# Altium PCB helix_4_multi_shield_host.PcbDoc (part 2 of 3)
Units mm, origin at the board's own origin, x right, y up, seen from the top; angles counter-clockwise.
Board outline 150 x 170 mm, 2 copper layers (Top Layer, Bottom Layer); 120 components, 166 nets, 674 pads, 2020 vias.
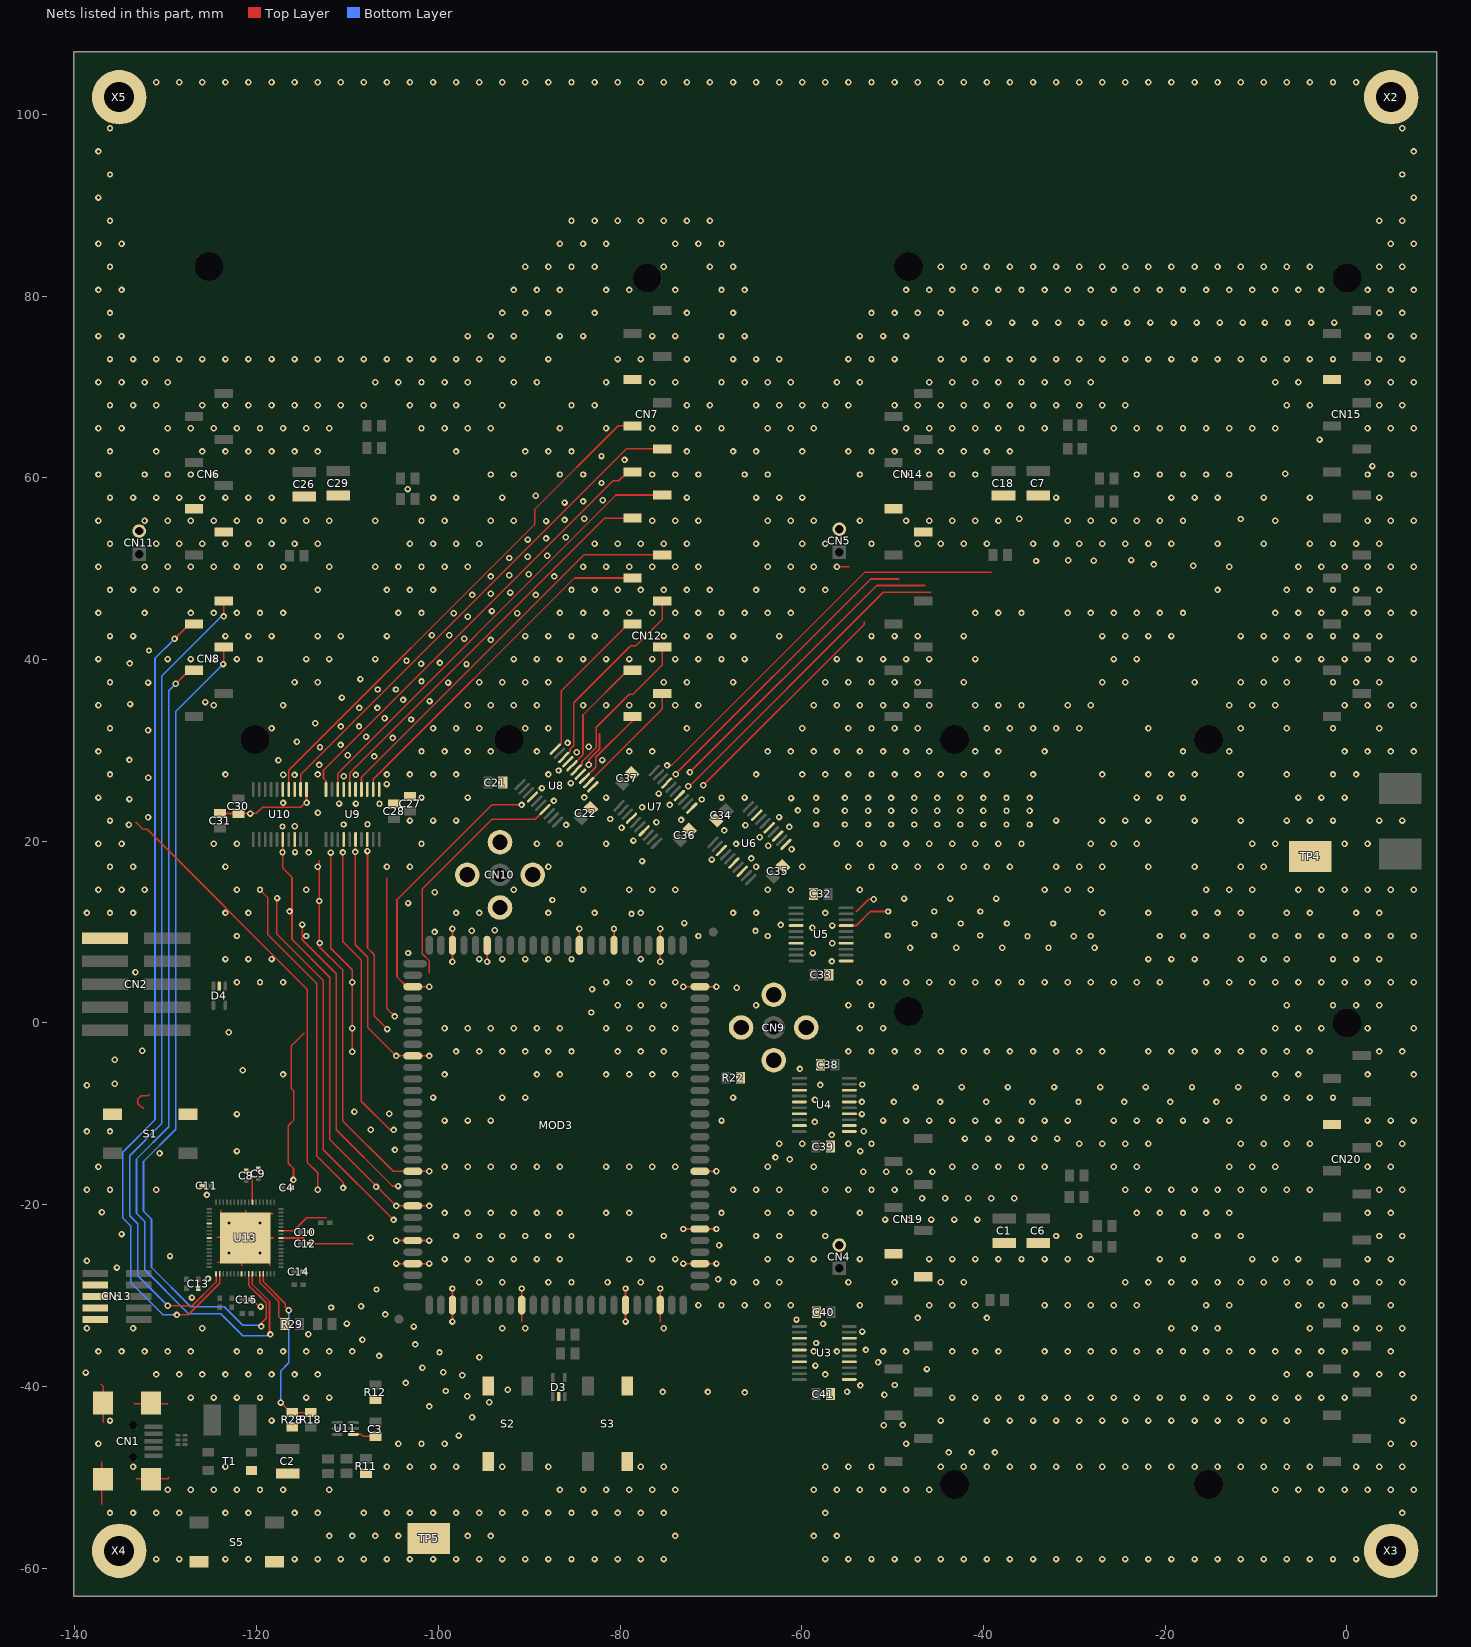
[diagram p2: the nets of this part, all layers, seen from the top]

## Via types
v1: diameter 0.711, hole 0.356, Top Layer to Bottom Layer, tented both sides, 2016 vias
v2: diameter 0.711, hole 0.356, Top Layer to Bottom Layer, tented top, 4 vias

## Nets (pads, with @x,y where several pads share a name; then routed paths per layer and width w, separated by ;. In a path a pad name is that pad's centre, name@x,y a point inside that pad or via, vN(x,y) a via of type N, cw(c..) or ccw(c..) an arc to the next point about the centre after c; other vN are vias at no path point) (continued)
GND: C1.2 C2.2 C3.2 C4.1 C6.2 C7.2 C8.2 C9.1 C10.2 C11.1 C12.2 C13.1 C14.1 C15.2 C18.2 C21.1 C22.1 C26.2 C27.1 C28.1 C29.2 C30.1 C31.1 C32.1 C33.1 C34.1 C35.1 C36.1 C37.1 C38.1 C39.1 C40.1 C41.1 CN1.0@-131.611,-41.831 CN1.0@-131.611,-50.231 CN1.0@-136.911,-41.831 CN1.0@-136.911,-50.231 CN2.10 CN4.2 CN5.2 CN6.6 CN6.7 CN7.35 CN9.2 CN10.2 CN11.2 CN13.3 CN13.5 CN13.7 CN13.9 CN14.6 CN14.7 CN15.35 CN19.6 CN19.7 CN20.35 D3.2 D4.2 MOD3.3 MOD3.9 MOD3.19 MOD3.22 MOD3.25 MOD3.27 MOD3.32 MOD3.38 MOD3.47 MOD3.50 MOD3.55 MOD3.58 MOD3.63 MOD3.79 MOD3.84 MOD3.88 MOD3.91 MOD3.99 MOD3.102 R11.1 R12.1 R22.1 R28.2 S1.1 S2.1 S3.1 S5.1 T1.4 TP4.1 TP5.1 U3.3 U3.5 U3.7 U3.11 U3.14 U3.16 U3.18 U4.3 U4.5 U4.7 U4.9 U4.11 U4.12 U4.14 U4.16 U4.18 U5.4 U5.7 U5.11 U5.14 U5.17 U6.3 U6.6 U6.8 U6.11 U6.13 U6.15 U6.18 U7.4 U7.7 U7.11 U7.14 U7.17 U8.4 U8.7 U8.11 U8.14 U8.17 U9.4 U9.6 U9.8 U9.11 U9.13 U9.15 U9.17 U10.6 U10.8 U10.11 U10.13 U10.15 U11.S1 U13.5 U13.9 U13.25 U13.43 U13.45 U13.58 U13.69 X2.1 X3.1 X4.1 X5.1 | length 741.2
  Top Layer w0.178: -137.16,-39.751 -136.906,-40.005 -136.906,-43.942 ; -137.033,-52.959 -137.033,-48.387 ; -133.477,-41.91 -129.794,-41.91 ; -133.287,22.098 -132.5,21.311 -132.047,21.311 -114.452,3.716 -114.452,-15.334 -113.284,-16.502 v1(-113.284,-18.369) ; -133.223,-50.165 -129.794,-50.165 -129.667,-50.038 ; -132.461,-9.398 -132.601,-9.258 -132.719,-9.258 -133.083,-8.894 -133.083,-8.378 -132.719,-8.014 -131.966,-8.014 -131.826,-7.874 ; -124.342,-23.591 U13.69@-121.345,-23.591 ; -124.291,-26.334 U13.69@-123.961,-26.334 ; C31.1@-124.026,23.05 C30.1@-122.005,23.05 ; U13.69@-123.961,-20.949 -123.961,-20.619 ; C30.1@-121.966,22.75 -121.641,23.075 -120.03,23.075 -119.355,23.75 -115.155,23.75 -114.516,24.389 U10.11@-114.516,25.7 ; -121.65,-26.74 U13.69@-121.65,-24.048 ; U13.69@-121.269,-23.667 -118.17,-23.667 ; U13.69@-121.218,-23.591 -121.218,-20.644 ; U13.58@-120.469,-19.717 -120.469,-16.751 ; C15.2@-120.457,-30.455 -119.758,-31.153 v1@-119.758,-31.28 ; v1(-119.634,14.651) -118.798,13.815 -118.798,9.752 -113.386,4.34 -113.386,-14.638 -110.49,-17.534 v1(-110.49,-18.161) ; -118.576,-26.715 U13.69@-118.576,-26.385 ; U13.69@-118.576,-20.975 -118.246,-20.975 ; v1@-117.775,13.75 -117.775,9.789 -112.662,4.676 -112.662,-13.944 v1(-104.93,-21.675) ; U13.43@-117.319,-23.667 -114.8,-23.667 ; U13.45@-117.319,-22.867 -115.927,-22.867 -114.498,-21.438 -112.329,-21.438 ; U10.6@-117.116,20.2 -117.116,17.05 -116.111,16.045 -116.111,9.203 -111.95,5.042 -111.95,-12.826 v1(-104.636,-20.14) MOD3.22@-102.816,-20.14 v1(-100.996,-20.14) ; v1(-115.951,-17.272) -115.951,-16.015 -116.535,-15.431 -116.535,-11.308 -115.9,-10.673 -115.9,-7.513 -116.205,-7.208 -116.205,-2.54 -114.783,-1.118 ; v1(-114.98,10.825) -114.98,9.149 -111.239,5.408 -111.239,-11.761 -105.05,-17.95 v1(-104.434,-17.95) ; C12.2@-114.165,-24.302 -109.45,-24.302 ; -113.105,17.825 v1(-113.105,13.425) -113.105,8.399 -110.528,5.822 -110.528,-10.783 -104.981,-16.33 MOD3.19@-102.816,-16.33 v1(-100.996,-16.33) ; v1(-111.853,18.75) -111.853,8.225 -109.474,5.846 v1@-109.474,-3.2 ; v1(-110.505,18.775) -110.505,8.951 -108.483,6.929 -108.483,-8.611 -105.308,-11.786 v1@-104.877,-11.786 ; U11.S1@-109.344,-45.288 -108.474,-45.288 -108.258,-45.504 C3.2@-107.255,-45.504 ; v1(-109.155,18.825) -109.155,8.606 -107.772,7.224 -107.772,-0.494 v1(-104.636,-3.63) MOD3.9@-102.816,-3.63 v1(-100.996,-3.63) ; v1(-107.805,18.925) -107.805,8.262 -107.061,7.518 -107.061,0.756 v1(-105.63,-0.675) ; -105.664,15.921 -105.7,15.885 -105.7,1.634 v1(-104.791,0.725) ; v1(-104.636,-26.49) MOD3.27@-102.816,-26.49 v1(-100.996,-26.49) ; v1(-104.636,-23.95) MOD3.25@-102.816,-23.95 v1(-100.996,-23.95) ; v1(-100.996,3.99) MOD3.3@-102.816,3.99 -103.481,3.99 -104.557,5.066 -104.557,13.565 -94.123,24 v1(-90.844,24) ; -100.986,5.5 -100.986,6.82 -101.77,7.604 -101.77,14.736 -94.096,22.41 -89.34,22.41 U8.7@-88.258,23.492 ; v1(-98.446,-32.87) MOD3.32@-98.446,-31.05 v1(-98.446,-29.23) ; v1(-98.446,6.73) MOD3.102@-98.446,8.55 v1(-98.446,10.37) ; v1(-94.636,6.73) MOD3.99@-94.636,8.55 ; -90.826,-32.87 MOD3.38@-90.826,-31.05 v1(-90.826,-29.23) ; MOD3.91@-84.476,8.55 v1(-84.476,10.37) ; MOD3.88@-80.666,8.661 v1(-80.666,10.37) ; v1(-79.396,-32.87) MOD3.47@-79.396,-31.05 v1(-79.396,-29.23) ; -75.586,-32.87 MOD3.50@-75.586,-31.05 v1(-75.586,-29.23) ; v1(-75.586,6.73) v1(-75.586,10.37) ; v1(-74.828,28.346) -74.334,28.346 -53.049,49.632 -39.167,49.632 ; v1(-73.859,27.363) -73.859,27.422 -52.412,48.87 -49.352,48.87 ; v1(-73.036,-26.49) MOD3.55@-71.216,-26.49 v1(-69.396,-26.49) ; v1(-73.036,-22.68) MOD3.58@-71.216,-22.68 v1(-69.396,-22.68) ; v1(-73.036,3.99) MOD3.79@-71.216,3.99 v1(-69.396,3.99) ; v1(-72.494,26.062) -72.368,26.062 -51.034,47.396 -45.822,47.396 ; v1(-72.314,27.584) -51.74,48.158 -46.457,48.158 ; MOD3.63@-71.216,-16.33 v1(-69.396,-16.33) ; v1(-70.841,26.162) -53.136,43.866 -53.136,44.158 ; U3.3@-60.297,-34.669 U3.3@-60.266,-34.7 ; v1(-56.134,50.211) -54.767,50.211
  Top Layer w0.203: v1(-83.45,28.418) -83.45,28.983 -82.258,30.175 -82.258,31.801 ; U5.17@-55.116,10.72 -53.999,10.72 -52.451,12.268 v1(-50.495,12.268) ; -54,12.268 -53.967,12.302 -53.927,12.302 -52.614,13.614 v1(-52.07,13.614)
  other v1: -131.064,-59.009 -128.524,-59.009 -123.444,-59.009 -120.904,-59.009 -115.824,-59.009 -113.284,-59.009 -110.744,-59.009 -108.204,-59.009 -105.664,-59.009 -103.124,-59.009 -100.584,-59.009 -98.044,-59.009 -95.504,-59.009 -92.964,-59.009 -90.424,-59.009 -87.884,-59.009 -85.344,-59.009 -82.804,-59.009 -80.264,-59.009 -77.724,-59.009 -75.184,-59.009 -57.404,-59.009 -54.864,-59.009 -52.324,-59.009 -49.784,-59.009 -47.244,-59.009 -44.704,-59.009 -42.164,-59.009 -39.624,-59.009 -37.084,-59.009 -34.544,-59.009 -32.004,-59.009 -29.464,-59.009 -26.924,-59.009 -24.384,-59.009 -21.844,-59.009 -19.304,-59.009 -16.764,-59.009 -14.224,-59.009 -11.684,-59.009 -9.144,-59.009 -6.604,-59.009 -4.064,-59.009 -1.524,-59.009 1.016,-59.009 -112.014,-56.469 -109.474,-56.469 -106.934,-56.469 -104.394,-56.469 -96.774,-56.469 -94.234,-56.469 -73.914,-56.469 -58.674,-56.469 -56.134,-56.469 -136.144,-53.929 -133.604,-53.929 -131.064,-53.929 -128.524,-53.929 -123.444,-53.929 -120.904,-53.929 -115.824,-53.929 -113.284,-53.929 -108.204,-53.929 -105.664,-53.929 -103.124,-53.929 -100.584,-53.929 -98.044,-53.929 -95.504,-53.929 -92.964,-53.929 -90.424,-53.929 -87.884,-53.929 -85.344,-53.929 -82.804,-53.929 -80.264,-53.929 -77.724,-53.929 -75.184,-53.929 -57.404,-53.929 6.096,-53.929 -129.794,-51.389 -127.254,-51.389 -124.714,-51.389 -122.174,-51.389 -119.634,-51.389 -117.094,-51.389 -112.014,-51.389 -86.614,-51.389 -84.074,-51.389 -81.534,-51.389 -78.994,-51.389 -76.454,-51.389 -73.914,-51.389 -58.674,-51.389 -56.134,-51.389 -53.594,-51.389 -51.054,-51.389 -48.514,-51.389 -45.974,-51.389 -7.874,-51.389 -5.334,-51.389 -2.794,-51.389 -0.254,-51.389 2.286,-51.389 4.826,-51.389 7.366,-51.389 -133.604,-48.849 -123.444,-48.849 -105.664,-48.849 -103.124,-48.849 -100.584,-48.849 -98.044,-48.849 -92.964,-48.849 -87.884,-48.849 -77.724,-48.849 -75.184,-48.849 -57.404,-48.849 -54.864,-48.849 -52.324,-48.849 -44.704,-48.849 -42.164,-48.849 -39.624,-48.849 -37.084,-48.849 -34.544,-48.849 -32.004,-48.849 -29.464,-48.849 -26.924,-48.849 -24.384,-48.849 -21.844,-48.849 -19.304,-48.849 -16.764,-48.849 -14.224,-48.849 -11.684,-48.849 -9.144,-48.849 -6.604,-48.849 -4.064,-48.849 1.016,-48.849 3.556,-48.849 6.096,-48.849 -43.815,-47.269 -41.275,-47.269 -38.735,-47.269 -137.414,-46.309 -104.394,-46.309 -101.854,-46.309 -99.314,-46.309 -48.514,-46.309 4.826,-46.309 7.366,-46.309 -97.765,-45.415 -50.978,-44.272 -48.895,-44.247 -136.144,-43.769 -118.364,-43.769 -44.704,-43.769 -39.624,-43.769 -37.084,-43.769 -34.544,-43.769 -32.004,-43.769 -29.464,-43.769 -26.924,-43.769 -24.384,-43.769 -21.844,-43.769 -19.304,-43.769 -16.764,-43.769 -14.224,-43.769 -11.684,-43.769 -9.144,-43.769 -6.604,-43.769 6.096,-43.769 -96.291,-43.409 -100.99,-42.215 -94.386,-41.758 -127.254,-41.229 -124.714,-41.229 -122.174,-41.229 -119.634,-41.229 -114.554,-41.229 -112.014,-41.229 -43.434,-41.229 -40.894,-41.229 -38.354,-41.229 -35.814,-41.229 -33.274,-41.229 -30.734,-41.229 -28.194,-41.229 -25.654,-41.229 -23.114,-41.229 -20.574,-41.229 -18.034,-41.229 -15.494,-41.229 -12.954,-41.229 -10.414,-41.229 -7.874,-41.229 -5.334,-41.229 -2.794,-41.229 -0.254,-41.229 7.366,-41.229 -96.825,-41.097 -50.905,-40.925 -66.269,-40.665 -75.311,-40.615 -70.333,-40.615 -55.016,-40.589 -99.187,-40.513 -92.354,-40.386 -53.543,-39.903 -49.753,-39.85 -103.581,-39.624 -97.358,-38.786 -131.064,-38.689 -128.524,-38.689 -125.984,-38.689 -123.444,-38.689 -120.904,-38.689 -118.364,-38.689 -115.824,-38.689 -113.284,-38.689 -57.404,-38.689 -6.604,-38.689 -4.064,-38.689 1.016,-38.689 3.556,-38.689 6.096,-38.689 -138.811,-38.481 -99.466,-38.456 -46.228,-38.1 -101.752,-37.948 -58.496,-37.719 -51.605,-37.35 -95.479,-36.805 -106.528,-36.652 -99.873,-36.271 -137.414,-36.149 -134.874,-36.149 -132.334,-36.149 -129.794,-36.149 -127.254,-36.149 -122.174,-36.149 -119.634,-36.149 -117.094,-36.149 -114.554,-36.149 -112.014,-36.149 -109.474,-36.149 -58.674,-36.149 -56.134,-36.149 -51.054,-36.149 -48.514,-36.149 -43.434,-36.149 -40.894,-36.149 -38.354,-36.149 -33.274,-36.149 -30.734,-36.149 -28.194,-36.149 -25.654,-36.149 -23.114,-36.149 -20.574,-36.149 -18.034,-36.149 -15.494,-36.149 -12.954,-36.149 -10.414,-36.149 -7.874,-36.149 -5.334,-36.149 -2.794,-36.149 -0.254,-36.149 4.826,-36.149 -52.934,-35.992 -102.54,-35.382 -58.42,-35.23 -108.356,-34.874 -114.3,-34.265 -53.347,-33.975 -138.684,-33.609 -133.604,-33.609 -125.984,-33.609 -92.964,-33.609 -90.424,-33.609 -75.184,-33.609 -19.304,-33.609 -16.764,-33.609 -14.224,-33.609 -4.064,-33.609 1.016,-33.609 3.556,-33.609 6.096,-33.609 -102.718,-33.426 -57.655,-33.12 -110.084,-33.096 -60.577,-32.65 -47.244,-32.469 -39.624,-32.469 -105.842,-32.08 -111.811,-31.318 -119.568,-31.217 -108.509,-31.191 -71.374,-31.069 -68.834,-31.069 -66.294,-31.069 -63.754,-31.069 -61.214,-31.069 -53.594,-31.069 -45.974,-31.069 -43.434,-31.069 -40.894,-31.069 -33.274,-31.069 -30.734,-31.069 -28.194,-31.069 -25.654,-31.069 -23.114,-31.069 -15.494,-31.069 -12.954,-31.069 -5.334,-31.069 -2.794,-31.069 -0.254,-31.069 4.826,-31.069 -135.382,-30.226 -127.127,-30.226 -106.807,-29.337 -95.504,-28.529 -92.964,-28.529 -87.884,-28.529 -85.344,-28.529 -81.38,-28.53 -77.724,-28.529 -67.564,-28.529 -65.024,-28.529 -62.484,-28.529 -54.864,-28.529 -49.784,-28.529 -44.704,-28.529 -42.164,-28.529 -24.384,-28.529 -21.844,-28.529 -19.304,-28.529 -16.764,-28.529 -14.224,-28.529 -11.684,-28.529 -9.144,-28.529 -6.604,-28.529 -4.064,-28.529 -1.524,-28.529 1.016,-28.529 3.556,-28.529 6.096,-28.529 -69.215,-28.219 -125.343,-28.129 -135.382,-26.924 -138.684,-26.162 -99.314,-25.989 -96.774,-25.989 -94.234,-25.989 -91.694,-25.989 -89.154,-25.989 -86.614,-25.989 -78.994,-25.989 -76.454,-25.989 -73.914,-25.989 -63.754,-25.989 -61.214,-25.989 -58.674,-25.989 -53.594,-25.989 -45.974,-25.989 -43.434,-25.989 -40.894,-25.989 -38.354,-25.989 -35.814,-25.989 -33.274,-25.989 -30.734,-25.989 -28.194,-25.989 -20.574,-25.989 -18.034,-25.989 -10.414,-25.989 -7.874,-25.989 -5.334,-25.989 2.286,-25.989 4.826,-25.989 -129.54,-25.654 -69.096,-24.475 -107.442,-23.622 -98.044,-23.449 -95.504,-23.449 -92.964,-23.449 -90.424,-23.449 -87.884,-23.449 -85.344,-23.449 -75.184,-23.449 -65.024,-23.449 -62.484,-23.449 -57.404,-23.449 -32.004,-23.449 -29.464,-23.449 -16.764,-23.449 -14.224,-23.449 -11.684,-23.449 3.556,-23.449 6.096,-23.449 -134.874,-23.241 -50.825,-21.641 -48.285,-21.641 -45.745,-21.641 -43.205,-21.641 -40.665,-21.641 -99.314,-20.909 -96.774,-20.909 -94.234,-20.909 -91.694,-20.909 -89.154,-20.909 -86.614,-20.909 -81.534,-20.909 -78.994,-20.909 -68.834,-20.909 -63.754,-20.909 -61.214,-20.909 -58.674,-20.909 -53.594,-20.909 -23.114,-20.909 -20.574,-20.909 -18.034,-20.909 -15.494,-20.909 -12.954,-20.909 2.286,-20.909 4.826,-20.909 -137.033,-20.828 -46.761,-19.304 -44.221,-19.304 -41.681,-19.304 -39.141,-19.304 -36.601,-19.304 -125.476,-18.923 -138.684,-18.369 -136.144,-18.369 -131.064,-18.369 -67.564,-18.369 -65.024,-18.369 -62.484,-18.369 -57.404,-18.369 -54.864,-18.369 -52.324,-18.369 -49.784,-18.369 -24.384,-18.369 -21.844,-18.369 -19.304,-18.369 -16.764,-18.369 -14.224,-18.369 -11.684,-18.369 -9.144,-18.369 -6.604,-18.369 -4.064,-18.369 3.556,-18.369 6.096,-18.369 -106.85,-18.025 -53.238,-16.383 -50.698,-16.383 -48.158,-16.383 -45.618,-16.383 -137.414,-15.829 -99.314,-15.829 -96.774,-15.829 -94.234,-15.829 -91.694,-15.829 -89.154,-15.829 -86.614,-15.829 -81.534,-15.829 -78.994,-15.829 -76.454,-15.829 -73.914,-15.829 -63.754,-15.829 -58.674,-15.829 -43.434,-15.829 -40.894,-15.829 -38.354,-15.829 -35.814,-15.829 -33.274,-15.829 -25.654,-15.829 -23.114,-15.829 -12.954,-15.829 -10.414,-15.829 -7.874,-15.829 2.286,-15.829 4.826,-15.829 -61.321,-15 -62.905,-14.8 -130.683,-14.351 -122.174,-14.097 -53.569,-14.097 -104.775,-13.97 -62.484,-13.289 -59.944,-13.289 -54.864,-13.289 -52.324,-13.289 -29.464,-13.289 -26.924,-13.289 -24.384,-13.289 -21.844,-13.289 -11.684,-13.289 -9.144,-13.289 -6.604,-13.289 -4.064,-13.289 3.556,-13.289 6.096,-13.289 -42.037,-12.725 -39.497,-12.725 -36.957,-12.725 -34.417,-12.725 -31.877,-12.725 -56.705,-12.325 -138.684,-11.938 -136.144,-11.938 -53.188,-11.913 -107.442,-11.76 -104.905,-11.775 -58.572,-10.897 -99.314,-10.749 -96.774,-10.749 -94.234,-10.749 -68.834,-10.749 -51.054,-10.749 -48.514,-10.749 -45.974,-10.749 -43.434,-10.749 -40.894,-10.749 -38.354,-10.749 -35.814,-10.749 -33.274,-10.749 -30.734,-10.749 -25.654,-10.749 -23.114,-10.749 -20.574,-10.749 -18.034,-10.749 -15.494,-10.749 -12.954,-10.749 2.286,-10.749 4.826,-10.749 7.366,-10.749 -122.174,-10.033 -53.38,-10.025 -105.405,-9.996 -109.245,-9.779 -53.38,-8.696 -49.86,-8.687 -44.78,-8.687 -39.7,-8.687 -34.62,-8.687 -29.54,-8.687 -24.511,-8.687 -19.431,-8.687 -14.351,-8.687 -58.547,-8.458 -100.584,-8.209 -92.964,-8.209 -90.424,-8.209 -67.564,-8.209 -9.144,-8.209 -6.604,-8.209 -4.064,-8.209 -1.524,-8.209 -47.473,-7.061 -42.393,-7.061 -37.313,-7.061 -32.233,-7.061 -27.153,-7.061 -22.123,-7.061 -17.043,-7.061 -11.963,-7.061 -138.684,-6.858 -57.955,-6.825 -53.33,-6.775 -135.611,-6.68 -117.094,-5.669 -99.314,-5.669 -89.154,-5.669 -86.614,-5.669 -81.534,-5.669 -78.994,-5.669 -76.454,-5.669 -73.914,-5.669 -7.874,-5.669 -5.334,-5.669 2.286,-5.669 7.366,-5.669 -121.539,-5.207 -60.198,-5.055 -135.611,-4.039 -109.474,-3.175 -98.044,-3.129 -95.504,-3.129 -92.964,-3.129 -90.424,-3.129 -87.884,-3.129 -85.344,-3.129 -80.264,-3.129 -77.724,-3.129 -75.184,-3.129 -54.864,-3.129 -52.324,-3.129 -49.784,-3.129 -47.244,-3.129 -44.704,-3.129 -42.164,-3.129 -39.624,-3.129 -37.084,-3.129 -34.544,-3.129 -32.004,-3.129 -29.464,-3.129 -26.924,-3.129 -21.844,-3.129 -19.304,-3.129 -16.764,-3.129 -14.224,-3.129 -11.684,-3.129 -9.144,-3.129 -6.604,-3.129 -4.064,-3.129 3.556,-3.129 6.096,-3.129 -132.588,-3.048 -123.063,-1.016 -109.474,-0.589 -99.314,-0.589 -96.774,-0.589 -94.234,-0.589 -91.694,-0.589 -89.154,-0.589 -86.614,-0.589 -81.534,-0.589 -78.994,-0.589 -76.454,-0.589 -73.914,-0.589 -53.594,-0.589 -51.054,-0.589 -7.874,-0.589 -5.334,-0.589 -2.794,-0.589 2.286,-0.589 7.366,-0.589 -83.18,1.15 -80.264,1.951 -77.724,1.951 -75.184,1.951 -65.024,1.951 -54.864,1.951 -52.324,1.951 -6.604,1.951 -1.524,1.951 1.016,1.951 3.556,1.951 -83.083,3.708 -67.158,3.886 -122.174,4.491 -119.634,4.491 -117.094,4.491 -109.474,4.491 -81.534,4.491 -78.994,4.491 -76.454,4.491 -73.914,4.491 -53.594,4.491 -51.054,4.491 -48.514,4.491 -45.974,4.491 -43.434,4.491 -40.894,4.491 -38.354,4.491 -35.814,4.491 -33.274,4.491 -30.734,4.491 -28.194,4.491 -25.654,4.491 -23.114,4.491 -20.574,4.491 -15.494,4.491 -12.954,4.491 -10.414,4.491 -7.874,4.491 -5.334,4.491 -2.794,4.491 -0.254,4.491 2.286,4.491 4.826,4.491 7.366,4.491 -133.35,5.588 -56.68,6.768 -123.444,7.031 -120.904,7.031 -118.364,7.031 -95.504,7.031 -92.964,7.031 -90.424,7.031 -87.884,7.031 -85.344,7.031 -77.724,7.031 -21.844,7.031 -19.304,7.031 -16.764,7.031 -11.684,7.031 -9.144,7.031 -6.604,7.031 -1.524,7.031 1.016,7.031 3.556,7.031 -103.33,7.7 -58.801,7.696 -48.082,8.28 -43.002,8.28 -37.922,8.28 -32.842,8.28 -27.762,8.28 -56.642,8.763 -113.055,8.802 -35.154,9.55 -30.074,9.55 -122.174,9.571 -114.554,9.571 -71.374,9.571 -63.754,9.571 -28.194,9.571 -20.574,9.571 -18.034,9.571 -15.494,9.571 -10.414,9.571 -7.874,9.571 -5.334,9.571 -2.794,9.571 -0.254,9.571 2.286,9.571 4.826,9.571 7.366,9.571 -50.521,9.627 -45.441,9.627 -40.361,9.627 -100.415,10.025 -65.091,10.125 -96.33,10.15 -93.802,10.211 -58.826,10.49 -56.642,10.719 -62.305,10.785 -47.574,10.947 -42.494,10.947 -37.414,10.947 -32.334,10.947 -72.923,10.998 -78.742,12 -138.684,12.111 -136.144,12.111 -133.604,12.111 -123.444,12.111 -120.904,12.111 -98.044,12.111 -95.504,12.111 -87.884,12.111 -82.804,12.111 -77.724,12.111 -67.564,12.111 -65.024,12.111 -57.404,12.111 -26.924,12.111 -21.844,12.111 -16.764,12.111 -14.224,12.111 -11.684,12.111 -6.604,12.111 -4.064,12.111 1.016,12.111 3.556,12.111 -116.38,12.275 -45.415,12.268 -40.335,12.268 -103.33,13.2 -87.448,13.536 -48.743,13.691 -43.663,13.691 -38.583,13.691 -117.755,13.75 -100.4,14.4 -137.414,14.651 -134.874,14.651 -132.334,14.651 -122.174,14.651 -114.554,14.651 -91.694,14.651 -84.074,14.651 -78.994,14.651 -76.454,14.651 -73.914,14.651 -63.754,14.651 -61.214,14.651 -53.594,14.651 -33.274,14.651 -30.734,14.651 -28.194,14.651 -15.494,14.651 -12.954,14.651 -10.414,14.651 -5.334,14.651 -2.794,14.651 -0.254,14.651 2.286,14.651 4.826,14.651 7.366,14.651 -136.144,17.191 -133.604,17.191 -123.444,17.191 -113.284,17.191 -105.664,17.191 -103.124,17.191 -87.884,17.191 -65.024,17.191 -59.944,17.191 -54.864,17.191 -52.324,17.191 -49.784,17.191 -47.244,17.191 -44.704,17.191 -42.164,17.191 -39.624,17.191 -37.084,17.191 -32.004,17.191 -29.464,17.191 -26.924,17.191 -21.844,17.191 -16.764,17.191 -11.684,17.191 -9.144,17.191 -77.58,17.825 -69.903,17.988 -65.557,18.11 -114.266,18.775 -117.155,18.8 -115.78,18.812 -61.114,19.132 -63.688,19.497 -67.234,19.71 -137.414,19.731 -134.874,19.731 -124.714,19.731 -122.174,19.731 -101.854,19.731 -89.154,19.731 -86.614,19.731 -81.534,19.731 -56.134,19.731 -53.594,19.731 -51.054,19.731 -48.514,19.731 -45.974,19.731 -43.434,19.731 -40.894,19.731 -38.354,19.731 -35.814,19.731 -28.194,19.731 -25.654,19.731 -23.114,19.731 -10.414,19.731 -7.874,19.731 -0.254,19.731 2.286,19.731 -78.53,20.075 -64.63,20.435 -68.528,21.187 -79.83,21.492 -61.38,21.581 -117.155,21.625 -115.802,21.65 -66.195,21.753 -85.947,21.8 -134.061,21.819 -110.439,21.844 -58.42,21.844 -55.245,21.844 -52.705,21.844 -50.165,21.844 -47.625,21.844 -45.085,21.844 -42.545,21.844 -40.005,21.844 -37.465,21.844 -34.925,21.844 -107.798,21.869 -75.997,22.098 -136.144,22.271 -103.124,22.271 -100.584,22.271 -98.044,22.271 -32.004,22.271 -26.924,22.271 -24.384,22.271 -21.844,22.271 -16.764,22.271 -11.684,22.271 -6.604,22.271 -4.064,22.271 -1.524,22.271 3.556,22.271 6.096,22.271 -73.282,22.345 -81.072,22.45 -131.953,22.631 -62.494,22.656 -120.699,23.05 -113.259,23.139 -58.42,23.368 -55.245,23.368 -52.705,23.368 -50.165,23.368 -47.625,23.368 -45.085,23.368 -42.545,23.368 -40.005,23.368 -37.465,23.368 -34.925,23.368 -60.425,23.4 -77.572,23.749 -74.528,23.997 -106.48,24.125 -110.93,24.15 -109.08,24.154 -117.094,24.225 -114.505,24.239 -87.276,24.437 -71.016,24.596 -134.01,24.638 -61.172,24.759 -58.42,24.765 -55.245,24.765 -52.705,24.765 -50.165,24.765 -47.625,24.765 -45.085,24.765 -42.545,24.765 -40.005,24.765 -37.465,24.765 -34.925,24.765 -137.414,24.811 -101.854,24.811 -96.774,24.811 -81.534,24.811 -68.834,24.811 -66.294,24.811 -23.114,24.811 -20.574,24.811 -18.034,24.811 -5.334,24.811 -2.794,24.811 -0.254,24.811 -83.953,24.829 -75.746,25.246 -88.6,25.857 -105.68,26.3 -85.417,26.4 -131.928,27 -110.414,27.153 -115.824,27.305 -109.093,27.305 -117.08,27.325 -136.144,27.351 -123.444,27.351 -113.284,27.351 -105.664,27.351 -103.124,27.351 -100.584,27.351 -98.044,27.351 -87.884,27.351 -65.024,27.351 -59.944,27.351 -57.404,27.351 -54.864,27.351 -52.324,27.351 -49.784,27.351 -47.244,27.351 -44.704,27.351 -42.164,27.351 -39.624,27.351 -34.544,27.351 -26.924,27.351 -21.844,27.351 -19.304,27.351 -16.764,27.351 -11.684,27.351 -6.604,27.351 -1.524,27.351 1.016,27.351 -86.77,27.789 -113.123,28.4 -117.605,28.925 -81.966,28.931 -134.01,28.956 -107.061,29.337 -109.982,29.464 -84.78,29.799 -137.414,29.891 -101.854,29.891 -99.314,29.891 -96.774,29.891 -94.234,29.891 -89.154,29.891 -78.994,29.891 -76.454,29.891 -63.754,29.891 -61.214,29.891 -58.674,29.891 -56.134,29.891 -53.594,29.891 -51.054,29.891 -48.514,29.891 -45.974,29.891 -40.894,29.891 -38.354,29.891 -33.274,29.891 -18.034,29.891 -12.954,29.891 -0.254,29.891 2.286,29.891 4.826,29.891 7.366,29.891 -113.03,30.353 -83.439,30.404 -110.769,30.607 -85.772,30.825 -115.573,30.957 -105.029,31.369 -107.95,31.496 -131.953,32.207 -136.144,32.431 -118.364,32.431 -100.584,32.431 -98.044,32.431 -95.504,32.431 -90.424,32.431 -87.884,32.431 -72.644,32.431 -59.944,32.431 -54.864,32.431 -52.324,32.431 -49.784,32.431 -47.244,32.431 -39.624,32.431 -37.084,32.431 -34.544,32.431 -32.004,32.431 -29.464,32.431 -21.844,32.431 -11.684,32.431 -6.604,32.431 -1.524,32.431 3.556,32.431 -110.744,32.639 -108.737,32.639 -113.541,32.989 -102.997,33.401 -105.918,33.528 -108.712,34.671 -106.705,34.671 -137.414,34.971 -124.714,34.971 -117.094,34.971 -96.774,34.971 -94.234,34.971 -91.694,34.971 -89.154,34.971 -84.074,34.971 -81.534,34.971 -78.994,34.971 -76.454,34.971 -73.914,34.971 -71.374,34.971 -58.674,34.971 -56.134,34.971 -53.594,34.971 -51.054,34.971 -48.514,34.971 -45.974,34.971 -40.894,34.971 -38.354,34.971 -35.814,34.971 -30.734,34.971 -28.194,34.971 -12.954,34.971 -10.414,34.971 -7.874,34.971 -0.254,34.971 2.286,34.971 4.826,34.971 7.366,34.971 -133.934,35.103 -125.655,35.325 -100.965,35.433 -103.886,35.56 -110.617,35.814 -106.68,36.703 -104.673,36.703 -131.953,37.465 -98.933,37.465 -136.144,37.511 -115.824,37.511 -113.284,37.511 -95.504,37.511 -92.964,37.511 -90.424,37.511 -87.884,37.511 -75.184,37.511 -72.644,37.511 -67.564,37.511 -57.404,37.511 -54.864,37.511 -52.324,37.511 -49.784,37.511 -47.244,37.511 -42.164,37.511 -26.924,37.511 -24.384,37.511 -16.764,37.511 -11.684,37.511 -9.144,37.511 -6.604,37.511 -1.524,37.511 1.016,37.511 3.556,37.511 -101.854,37.592 -108.585,37.846 -96.901,39.497 -101.905,39.548 -133.96,39.573 -99.822,39.624 -103.505,39.878 -137.414,40.051 -129.794,40.051 -127.254,40.051 -124.714,40.051 -122.174,40.051 -119.634,40.051 -114.554,40.051 -112.014,40.051 -106.934,40.051 -91.694,40.051 -89.154,40.051 -86.614,40.051 -84.074,40.051 -81.534,40.051 -78.994,40.051 -76.454,40.051 -73.914,40.051 -71.374,40.051 -68.834,40.051 -66.294,40.051 -56.134,40.051 -53.594,40.051 -51.054,40.051 -48.514,40.051 -45.974,40.051 -40.894,40.051 -25.654,40.051 -23.114,40.051 -7.874,40.051 -5.334,40.051 -2.794,40.051 -0.254,40.051 2.286,40.051 4.826,40.051 7.366,40.051 -131.851,40.996 -94.234,42.164 -97.155,42.291 -136.144,42.591 -133.604,42.591 -123.444,42.591 -120.904,42.591 -118.364,42.591 -113.284,42.591 -110.744,42.591 -105.664,42.591 -90.424,42.591 -87.884,42.591 -85.344,42.591 -82.804,42.591 -75.184,42.591 -72.644,42.591 -70.104,42.591 -67.564,42.591 -62.484,42.591 -52.324,42.591 -49.784,42.591 -47.244,42.591 -42.164,42.591 -26.924,42.591 -24.384,42.591 -21.844,42.591 -19.304,42.591 -11.684,42.591 -9.144,42.591 -6.604,42.591 -4.064,42.591 -1.524,42.591 1.016,42.591 3.556,42.591 -100.711,42.672 -98.806,42.672 -96.774,44.704 -98.298,45.085 -91.313,45.085 -137.414,45.131 -132.334,45.131 -127.254,45.131 -124.714,45.131 -122.174,45.131 -119.634,45.131 -117.094,45.131 -104.394,45.131 -101.854,45.131 -86.614,45.131 -84.074,45.131 -81.534,45.131 -78.994,45.131 -76.454,45.131 -73.914,45.131 -71.374,45.131 -68.834,45.131 -66.294,45.131 -63.754,45.131 -61.214,45.131 -40.894,45.131 -38.354,45.131 -35.814,45.131 -30.734,45.131 -28.194,45.131 -25.654,45.131 -23.114,45.131 -20.574,45.131 -18.034,45.131 -7.874,45.131 -5.334,45.131 -2.794,45.131 -0.254,45.131 2.286,45.131 4.826,45.131 7.366,45.131 -94.107,45.339 -96.266,47.117 -89.281,47.117 -94.234,47.244 -92.075,47.371 -136.144,47.671 -133.604,47.671 -131.064,47.671 -128.524,47.671 -113.284,47.671 -105.664,47.671 -103.124,47.671 -100.584,47.671 -85.344,47.671 -82.804,47.671 -80.264,47.671 -77.724,47.671 -75.184,47.671 -72.644,47.671 -70.104,47.671 -65.024,47.671 -59.944,47.671 -57.404,47.671 -14.224,47.671 -6.604,47.671 -4.064,47.671 -1.524,47.671 1.016,47.671 3.556,47.671 -94.234,49.149 -87.249,49.149 -92.202,49.276 -90.043,49.403 -137.414,50.211 -132.334,50.211 -129.794,50.211 -127.254,50.211 -124.714,50.211 -122.174,50.211 -119.634,50.211 -117.094,50.211 -112.014,50.211 -106.934,50.211 -104.394,50.211 -101.854,50.211 -99.314,50.211 -96.774,50.211 -84.074,50.211 -81.534,50.211 -78.994,50.211 -76.454,50.211 -73.914,50.211 -71.374,50.211 -63.754,50.211 -61.214,50.211 -58.674,50.211 -12.954,50.211 -5.334,50.211 -2.794,50.211 -0.254,50.211 2.286,50.211 4.826,50.211 7.366,50.211 -16.916,50.317 -21.26,50.47 -34.214,50.851 -27.864,50.876 -30.658,50.927 -23.724,50.952 -92.202,51.181 -90.17,51.308 -88.011,51.435 -136.144,52.751 -131.064,52.751 -128.524,52.751 -125.984,52.751 -123.444,52.751 -120.904,52.751 -118.364,52.751 -115.824,52.751 -113.284,52.751 -103.124,52.751 -100.584,52.751 -98.044,52.751 -95.504,52.751 -82.804,52.751 -80.264,52.751 -77.724,52.751 -75.184,52.751 -72.644,52.751 -65.024,52.751 -59.944,52.751 -57.404,52.751 -52.324,52.751 -47.244,52.751 -44.704,52.751 -42.164,52.751 -39.624,52.751 -34.544,52.751 -32.004,52.751 -29.464,52.751 -26.924,52.751 -24.384,52.751 -21.844,52.751 -19.304,52.751 -14.224,52.751 -9.144,52.751 -4.064,52.751 -1.524,52.751 1.016,52.751 3.556,52.751 -90.17,53.213 -88.138,53.34 -85.979,53.467 -88.138,55.245 -137.414,55.291 -132.334,55.291 -129.794,55.291 -127.254,55.291 -124.714,55.291 -122.174,55.291 -119.634,55.291 -117.094,55.291 -114.554,55.291 -112.014,55.291 -106.934,55.291 -101.854,55.291 -99.314,55.291 -94.234,55.291 -91.694,55.291 -76.454,55.291 -73.914,55.291 -71.374,55.291 -63.754,55.291 -61.214,55.291 -58.674,55.291 -53.594,55.291 -48.514,55.291 -45.974,55.291 -43.434,55.291 -40.894,55.291 -38.354,55.291 -30.734,55.291 -28.194,55.291 -25.654,55.291 -23.114,55.291 -20.574,55.291 -18.034,55.291 -7.874,55.291 2.286,55.291 4.826,55.291 7.366,55.291 -86.106,55.372 -11.684,55.474 -83.947,55.499 -36.068,55.499 -86.106,57.277 -84.074,57.404 -81.915,57.531 -136.144,57.831 -133.604,57.831 -131.064,57.831 -128.524,57.831 -125.984,57.831 -123.444,57.831 -120.904,57.831 -118.364,57.831 -100.584,57.831 -98.044,57.831 -92.964,57.831 -72.644,57.831 -65.024,57.831 -62.484,57.831 -59.944,57.831 -32.004,57.831 -19.304,57.831 -16.764,57.831 -14.224,57.831 -9.144,57.831 -4.064,57.831 3.556,57.831 -89.281,58.039 -103.378,58.762 -82.042,59.436 -137.414,60.371 -132.334,60.371 -129.794,60.371 -127.254,60.371 -124.714,60.371 -94.234,60.371 -91.694,60.371 -86.614,60.371 -84.074,60.371 -76.454,60.371 -73.914,60.371 -71.374,60.371 -66.294,60.371 -63.754,60.371 -53.594,60.371 -48.514,60.371 -45.974,60.371 -43.434,60.371 -40.894,60.371 -23.114,60.371 -20.574,60.371 -18.034,60.371 -15.494,60.371 -12.954,60.371 2.286,60.371 4.826,60.371 7.366,60.371 -6.782,60.452 2.809,61.299 -79.502,61.976 -82.042,62.403 -136.144,62.911 -131.064,62.911 -125.984,62.911 -123.444,62.911 -120.904,62.911 -118.364,62.911 -115.824,62.911 -113.284,62.911 -98.044,62.911 -90.424,62.911 -87.884,62.911 -85.344,62.911 -72.644,62.911 -67.564,62.911 -65.024,62.911 -59.944,62.911 -54.864,62.911 -52.324,62.911 -49.784,62.911 -47.244,62.911 -44.704,62.911 -42.164,62.911 -39.624,62.911 -37.084,62.911 -2.997,64.211 -137.414,65.451 -134.874,65.451 -129.794,65.451 -127.254,65.451 -124.714,65.451 -122.174,65.451 -119.634,65.451 -117.094,65.451 -114.554,65.451 -112.014,65.451 -101.854,65.451 -99.314,65.451 -96.774,65.451 -94.234,65.451 -86.614,65.451 -81.534,65.451 -76.454,65.451 -73.914,65.451 -71.374,65.451 -68.834,65.451 -63.754,65.451 -61.214,65.451 -58.674,65.451 -48.514,65.451 -45.974,65.451 -43.434,65.451 -40.894,65.451 -38.354,65.451 -35.814,65.451 -33.274,65.451 -25.654,65.451 -23.114,65.451 -20.574,65.451 -18.034,65.451 -15.494,65.451 -12.954,65.451 -10.414,65.451 -7.874,65.451 2.286,65.451 4.826,65.451 7.366,65.451 -136.144,67.991 -133.604,67.991 -131.064,67.991 -125.984,67.991 -123.444,67.991 -120.904,67.991 -118.364,67.991 -115.824,67.991 -113.284,67.991 -110.744,67.991 -108.204,67.991 -103.124,67.991 -100.584,67.991 -98.044,67.991 -92.964,67.991 -85.344,67.991 -82.804,67.991 -72.644,67.991 -70.104,67.991 -65.024,67.991 -62.484,67.991 -59.944,67.991 -57.404,67.991 -54.864,67.991 -49.784,67.991 -47.244,67.991 -44.704,67.991 -42.164,67.991 -39.624,67.991 -37.084,67.991 -34.544,67.991 -32.004,67.991 -29.464,67.991 -26.924,67.991 -24.384,67.991 -6.604,67.991 -4.064,67.991 3.556,67.991 6.096,67.991 -137.414,70.531 -134.874,70.531 -132.334,70.531 -129.794,70.531 -106.934,70.531 -104.394,70.531 -101.854,70.531 -99.314,70.531 -96.774,70.531 -91.694,70.531 -89.154,70.531 -81.534,70.531 -76.454,70.531 -73.914,70.531 -68.834,70.531 -66.294,70.531 -63.754,70.531 -61.214,70.531 -56.134,70.531 -53.594,70.531 -45.974,70.531 -43.434,70.531 -40.894,70.531 -38.354,70.531 -35.814,70.531 -33.274,70.531 -30.734,70.531 -28.194,70.531 -7.874,70.531 -5.334,70.531 2.286,70.531 4.826,70.531 7.366,70.531 -136.144,73.071 -133.604,73.071 -131.064,73.071 -128.524,73.071 -125.984,73.071 -123.444,73.071 -120.904,73.071 -118.364,73.071 -115.824,73.071 -113.284,73.071 -110.744,73.071 -108.204,73.071 -105.664,73.071 -103.124,73.071 -100.584,73.071 -98.044,73.071 -95.504,73.071 -92.964,73.071 -87.884,73.071 -80.264,73.071 -77.724,73.071 -72.644,73.071 -67.564,73.071 -65.024,73.071 -62.484,73.071 -54.864,73.071 -52.324,73.071 -49.784,73.071 -44.704,73.071 -42.164,73.071 -39.624,73.071 -37.084,73.071 -34.544,73.071 -32.004,73.071 -29.464,73.071 -26.924,73.071 -24.384,73.071 -21.844,73.071 -19.304,73.071 -16.764,73.071 -14.224,73.071 -11.684,73.071 -9.144,73.071 -6.604,73.071 -4.064,73.071 -1.524,73.071 3.556,73.071 6.096,73.071 -137.414,75.611 -134.874,75.611 -96.774,75.611 -94.234,75.611 -91.694,75.611 -86.614,75.611 -84.074,75.611 -76.454,75.611 -73.914,75.611 -68.834,75.611 -66.294,75.611 -53.594,75.611 -51.054,75.611 -48.514,75.611 2.286,75.611 4.826,75.611 7.366,75.611 -41.935,77.089 -39.395,77.089 -36.855,77.089 -34.315,77.089 -31.775,77.089 -29.235,77.089 -26.695,77.089 -24.155,77.089 -21.615,77.089 -19.075,77.089 -16.535,77.089 -13.995,77.089 -11.455,77.089 -9.017,77.089 -6.477,77.089 -3.937,77.089 -1.397,77.089 -136.144,78.151 -92.964,78.151 -90.424,78.151 -87.884,78.151 -82.804,78.151 -72.644,78.151 -67.564,78.151 -52.324,78.151 -49.784,78.151 -47.244,78.151 -44.704,78.151 3.556,78.151 6.096,78.151 -137.414,80.691 -134.874,80.691 -91.694,80.691 -89.154,80.691 -86.614,80.691 -81.534,80.691 -78.994,80.691 -73.914,80.691 -68.834,80.691 -66.294,80.691 -48.514,80.691 -45.974,80.691 -43.434,80.691 -40.894,80.691 -38.354,80.691 -35.814,80.691 -33.274,80.691 -30.734,80.691 -28.194,80.691 -25.654,80.691 -23.114,80.691 -20.574,80.691 -18.034,80.691 -15.494,80.691 -12.954,80.691 -10.414,80.691 -7.874,80.691 -5.334,80.691 -2.794,80.691 2.286,80.691 4.826,80.691 7.366,80.691 -136.144,83.231 -90.424,83.231 -87.884,83.231 -85.344,83.231 -82.804,83.231 -75.184,83.231 -70.104,83.231 -67.564,83.231 -44.704,83.231 -42.164,83.231 -39.624,83.231 -37.084,83.231 -34.544,83.231 -32.004,83.231 -29.464,83.231 -26.924,83.231 -24.384,83.231 -21.844,83.231 -19.304,83.231 -16.764,83.231 -14.224,83.231 -11.684,83.231 -9.144,83.231 -6.604,83.231 -4.064,83.231 3.556,83.231 6.096,83.231 -137.414,85.771 -134.874,85.771 -86.614,85.771 -84.074,85.771 -81.534,85.771 -73.914,85.771 -71.374,85.771 -68.834,85.771 4.826,85.771 7.366,85.771 -136.144,88.311 -85.344,88.311 -82.804,88.311 -80.264,88.311 -77.724,88.311 -75.184,88.311 -72.644,88.311 -70.104,88.311 3.556,88.311 6.096,88.311 -137.414,90.851 7.366,90.851 -136.144,93.391 6.096,93.391 -137.414,95.931 7.366,95.931 -136.144,98.471 6.096,98.471 -131.064,103.551 -128.524,103.551 -125.984,103.551 -123.444,103.551 -120.904,103.551 -118.364,103.551 -115.824,103.551 -113.284,103.551 -110.744,103.551 -108.204,103.551 -105.664,103.551 -103.124,103.551 -100.584,103.551 -98.044,103.551 -95.504,103.551 -92.964,103.551 -90.424,103.551 -87.884,103.551 -85.344,103.551 -82.804,103.551 -80.264,103.551 -77.724,103.551 -75.184,103.551 -72.644,103.551 -70.104,103.551 -67.564,103.551 -65.024,103.551 -62.484,103.551 -59.944,103.551 -57.404,103.551 -54.864,103.551 -52.324,103.551 -49.784,103.551 -47.244,103.551 -44.704,103.551 -42.164,103.551 -39.624,103.551 -37.084,103.551 -34.544,103.551 -32.004,103.551 -29.464,103.551 -26.924,103.551 -24.384,103.551 -21.844,103.551 -19.304,103.551 -16.764,103.551 -14.224,103.551 -11.684,103.551 -9.144,103.551 -6.604,103.551 -4.064,103.551 -1.524,103.551 1.016,103.551
  other v2: -123.047,-25.318 -119.618,-25.318 -123.047,-22.016 -119.618,-22.016
HALF_VIN: R18.2 R28.1 U13.31 | length 19.5
  Top Layer w0.178: U13.31@-119.269,-27.617 -119.269,-28.468 -116.84,-30.897 -116.84,-31.242 v1(-116.459,-31.623) ; v1(-117.348,-41.783) -116.243,-42.888 R18.2@-114.046,-42.888
  Bottom Layer w0.178: v1(-117.348,-41.783) -117.348,-38.303 -116.459,-37.414 v1(-116.459,-31.623)
LED_0: R29.2 U13.30 | length 6.7
  Top Layer w0.178: U13.30@-119.669,-27.617 -119.669,-28.576 -117.579,-30.666 -117.579,-32.319 -116.901,-32.997 R29.2@-116.901,-33.147
MOD0_A0: CN8.9 U13.18 | length 90.9
  Top Layer w0.178: v1@-129.54,-31.115 -127.076,-31.115 -124.469,-28.508 U13.18@-124.469,-27.617 ; v1(-123.62,44.753) CN8.9@-123.62,46.44
  Bottom Layer w0.178: v1@-129.54,-31.115 v1(-129.794,-31.115) -133.096,-27.813 -133.096,-22.108 -133.985,-21.219 -133.985,-14.605 -130.429,-11.049 -130.429,38.227 v1@-123.825,44.831
MOD0_A1: CN8.10 U13.19 | length 89.6
  Top Layer w0.178: v1(-129.032,42.291) CN8.10@-127.423,43.9 ; v1@-128.524,-32.131 -127.533,-32.131 -124.069,-28.666 U13.19@-124.069,-27.617
  Bottom Layer w0.178: v1(-129.032,42.291) -131.191,40.132 -131.191,-10.668 -134.747,-14.224 -134.747,-21.463 -133.88,-22.33 -133.88,-28.553 -130.302,-32.131 v1@-128.524,-32.131
  other v1: -128.778,-32.131
MOD0_A2: CN8.11 U13.27 | length 93.3
  Top Layer w0.178: v1@-123.62,39.575 CN8.11@-123.62,41.36 ; U13.27@-120.869,-27.617 -120.869,-28.89 -118.945,-30.813 -118.945,-32.491 v1@-119.554,-33.1
  Bottom Layer w0.178: v1(-123.698,39.497) -128.905,34.29 -128.905,-11.684 -132.461,-15.24 -132.461,-20.732 -131.572,-21.621 -131.572,-26.924 -127.254,-31.242 -123.571,-31.242 -121.539,-33.274 v1@-119.634,-33.274
  other v1: -119.507,-33.401
MOD0_A3: CN8.12 U13.28 | length 93
  Top Layer w0.178: v1(-128.905,37.338) CN8.12@-127.423,38.82 ; U13.28@-120.469,-27.617 -120.469,-28.787 -118.59,-30.666 -118.59,-34.008 v1@-118.745,-34.163
  Bottom Layer w0.178: v1(-128.905,37.338) -129.667,36.576 -129.667,-11.43 -133.223,-14.986 -133.223,-20.955 -132.334,-21.844 -132.334,-27.178 -127.508,-32.004 -123.952,-32.004 -121.539,-34.417 -118.745,-34.417 v1@-118.745,-34.163
  other v1: -118.491,-34.29
MOD0_D0: CN12.21 U8.13 | length 9.1
  Top Layer w0.178: U8.13@-83.974,26.857 -82.677,28.154 -82.677,29.235 -78.64,33.272 CN12.21@-78.64,33.74
MOD0_D1: CN12.22 U8.12 | length 13.3
  Top Layer w0.178: U8.12@-83.564,26.348 -75.36,34.552 CN12.22@-75.36,36.28
MOD0_D2: CN12.23 U8.16 | length 13.7
  Top Layer w0.178: U8.16@-85.34,28.249 -84.074,29.515 -84.074,33.909 -79.223,38.76 CN12.23@-78.62,38.76 ; CN12.23@-78.64,38.76 CN12.23@-78.64,38.82
MOD0_D3: CN12.24 U8.15 | length 17.7
  Top Layer w0.178: U8.15@-84.829,27.841 -84.189,28.481 -84.189,28.765 -82.626,30.328 -82.626,32.563 -78.994,36.195 -78.571,36.195 -75.36,39.406 CN12.24@-75.36,41.36
MOD0_D4: CN12.25 U8.20 | length 17.6
  Top Layer w0.178: U8.20@-87.154,30.112 -86.484,30.782 -86.484,36.532 -79.116,43.9 CN12.25@-78.64,43.9
MOD0_D5: CN12.26 U8.18 | length 22.1
  Top Layer w0.178: U8.18@-86.272,29.156 -85.506,29.922 -85.506,30.112 -85.09,30.528 -85.09,35.257 -78.818,41.529 -78.237,41.529 -75.36,44.406 CN12.26@-75.36,46.44
MOD0_D6: CN12.27 U9.12 | length 38.8
  Top Layer w0.178: U9.12@-107.166,25.7 -107.166,26.819 -85.005,48.98 CN12.27@-78.64,48.98
MOD0_D7: CN12.28 U9.14 | length 44.6
  Top Layer w0.178: U9.14@-108.466,25.7 -108.466,27.043 -83.989,51.52 CN12.28@-75.36,51.52
MOD0_D8: CN7.29 U9.16 | length 44.6
  Top Layer w0.178: U9.16@-109.766,25.7 -109.766,27.521 -81.719,55.568 CN7.29@-78.64,55.568
MOD0_D9: CN7.30 U9.18 | length 50.2
  Top Layer w0.178: U9.18@-111.066,25.7 -111.058,25.708 -111.058,27.499 -80.449,58.108 CN7.30@-75.36,58.108
MOD0_D10: CN7.31 U9.20 | length 49.8
  Top Layer w0.178: U9.20@-112.366,25.7 -112.366,26.641 -112.649,26.924 -112.649,27.813 -80.772,59.69 -80.137,59.69 -79.179,60.648 CN7.31@-78.64,60.648
MOD0_D11: CN7.32 U10.12 | length 56.3
  Top Layer w0.178: U10.12@-115.166,25.7 -115.166,27.328 -79.306,63.188 CN7.32@-75.36,63.188
MOD0_D12: CN7.33 U10.14 | length 56.6
  Top Layer w0.178: U10.14@-116.466,25.7 -116.458,25.708 -116.458,27.814 -89.408,54.864 -89.408,56.515 -80.195,65.728 CN7.33@-78.64,65.728